# Altium PCB EmgAcqFinal.PcbDoc (part 1 of 2)
Units mil, origin at the board's own origin, x right, y up, seen from the top; angles counter-clockwise.
Board outline 3500 x 2175 mil, 2 copper layers (Top Layer, Bottom Layer); 116 components, 96 nets, 364 pads, 143 vias.
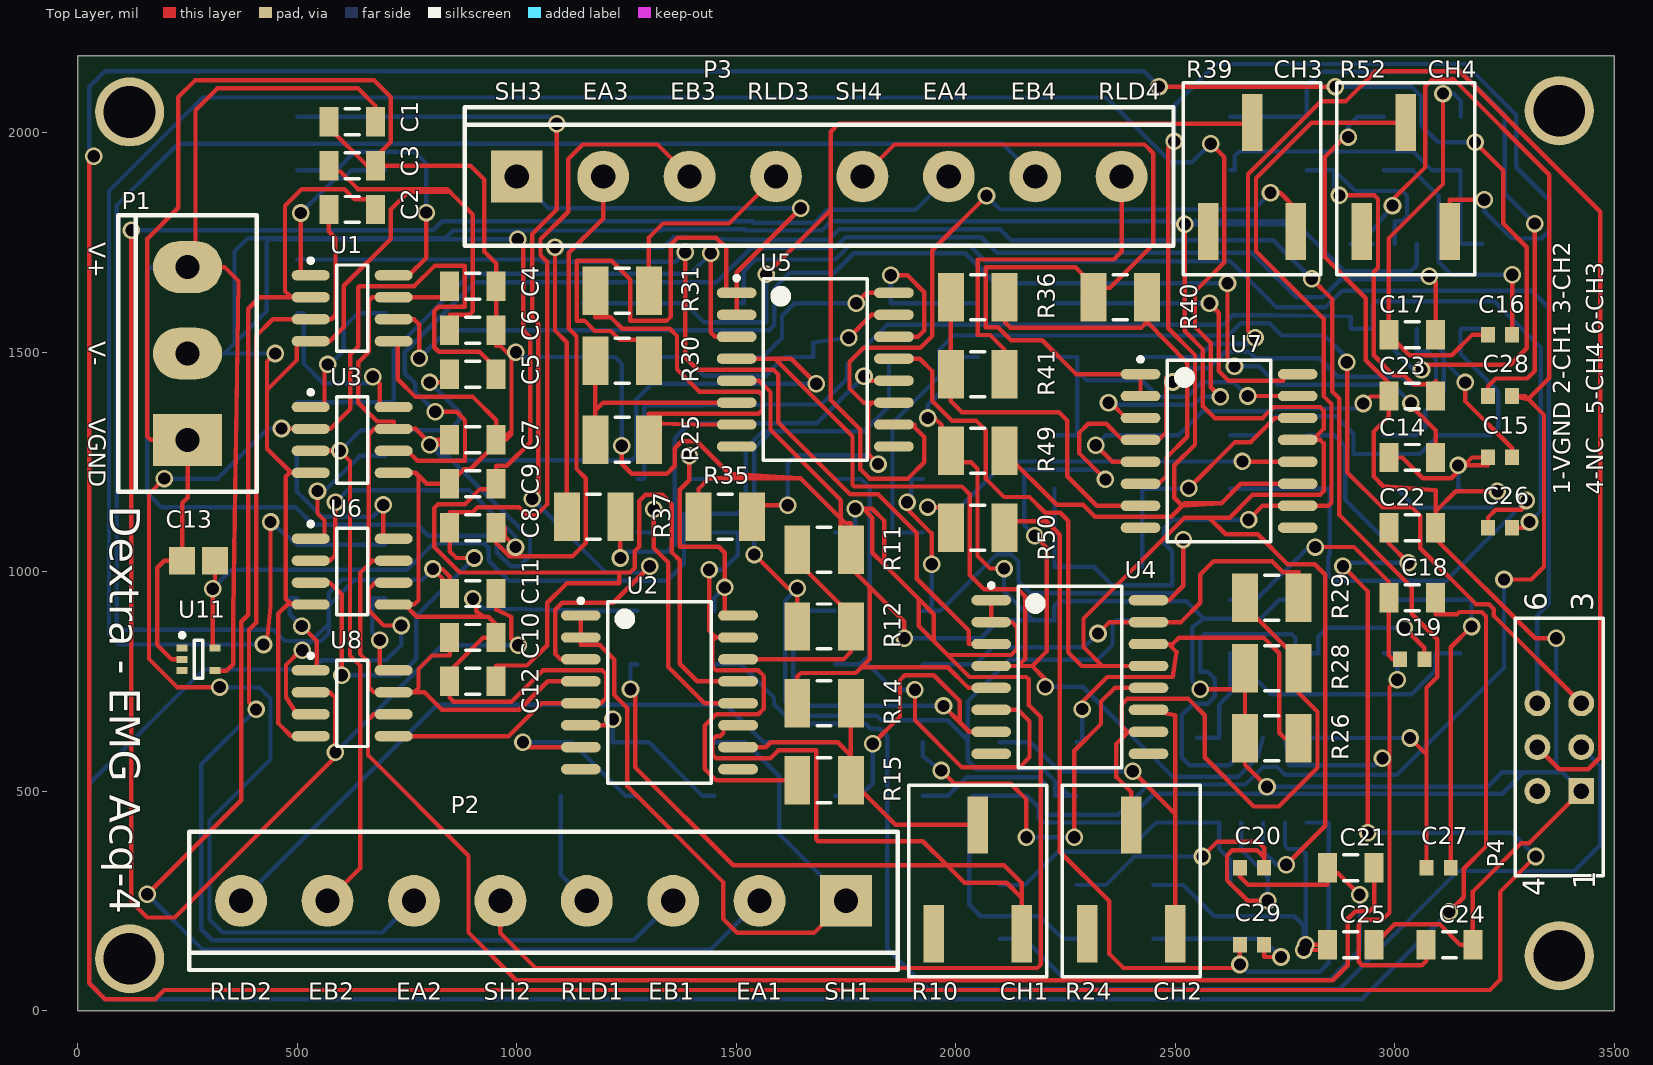
[diagram p0: Top Layer view]
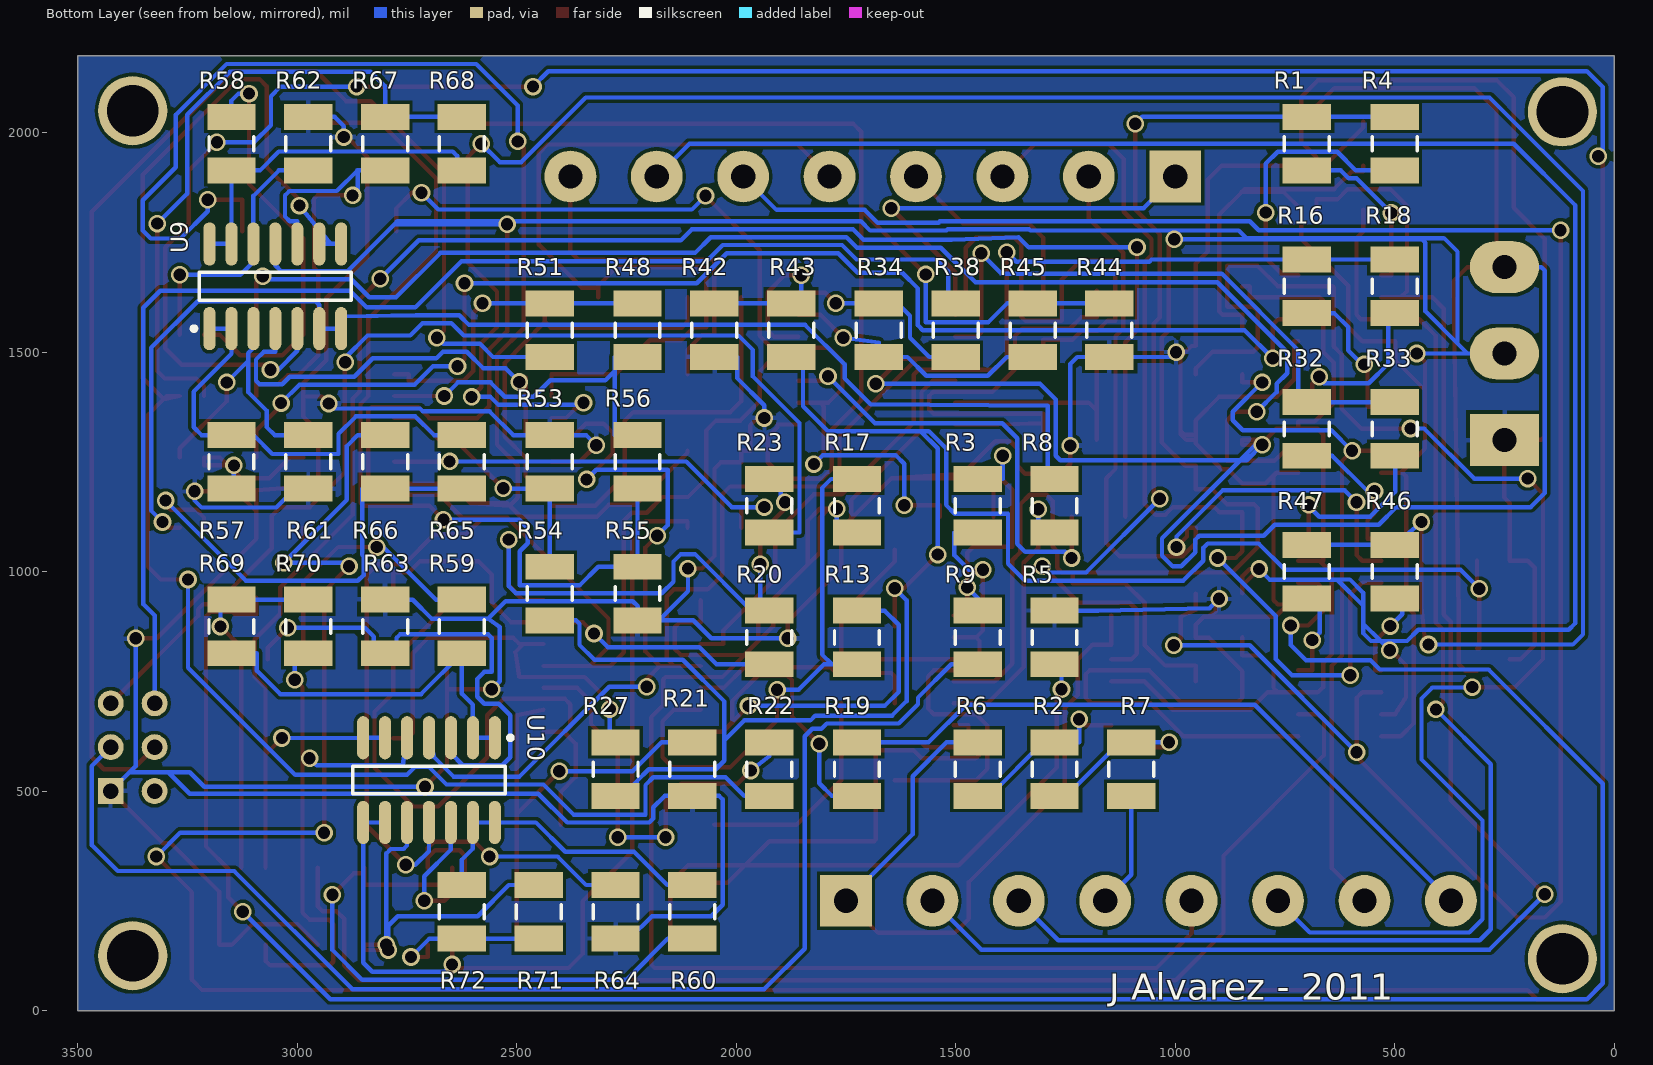
[diagram p1: Bottom Layer view, seen from below]

## Layer stack, top to bottom
Top Layer: signal copper 1.4
Dielectric: dielectric 12.6, FR-4, Dk 4.8
Bottom Layer: signal copper 1.4

## Board outline
0,2175 3500,2175 3500,0 0,0 0,2165.35

## Design rules (kind name [scope] priority, off if disabled: settings)
Clearance [All] p1: gap=8
HoleSize [All] p1: absolutevalues=TRUE maxlimit=110 minlimit=1 maxpercent=80.000 minpercent=20.000
HoleToHoleClearance [All] p1: gap=8 allowstackedmicrovias=TRUE
MinimumSolderMaskSliver [All] p1: minsoldermaskwidth=8
PolygonConnect [All] p1: connectstyle=Relief reliefconductorwidth=10 reliefentries=4 polygonreliefangle="90 Angle"
RoomDefinition EmgAcq [InComponentClass('EmgAcq')] p1: confinementstyle=ConfineIn formatcopy=TRUE lockcomponents=FALSE outline 0,0 3500,0 3500,2175 0,2175
RoutingVias [All] p1: holewidth=28 width=40 viastyle="Through Hole" minholewidth=28 minwidth=40 maxholewidth=28 maxwidth=40
SilkToSilkClearance [All] p1: silktosilkclearance=1
SilkscreenOverComponentPads [All] p1: minsilkscreentomaskgap=2
SolderMaskExpansion [All] p1: expansion=4
ViasUnderSMD [All] p1: allowed=FALSE
Width [All] p1: maxlimit=10 minlimit=8 preferedwidth=10
23 further rules are at their usual default settings.

## Components (designator, comment, footprint, x,y, rotation, side; value= is the part's Value field where it differs from the comment)
C1 "Cap Semi" C1206 625,2025 r180 top
C2 "Cap Semi" C1206 625,1825 r0 top
C3 "Cap Semi" C1206 625,1925 r180 top
C4 "Cap Semi" C1206 900,1650 r0 top
C5 "Cap Semi" C1206 900,1450 r0 top
C6 "Cap Semi" C1206 900,1550 r180 top
C7 "Cap Semi" C1206 900,1300 r0 top
C8 "Cap Semi" C1206 900,1100 r0 top
C9 "Cap Semi" C1206 900,1200 r0 top
C10 "Cap Semi" C1206 900,850 r0 top
C11 "Cap Semi" C1206 900,950 r0 top
C12 "Cap Semi" C1206 900,750 r0 top
C13 "Cap Semi" CAPC2012M 275,1025 r180 top
C14 "Cap Semi" C1206 3040,1260 r0 top
C15 "Cap Semi" 1608[0603] 3240,1260 r180 top
C16 "Cap Semi" 1608[0603] 3240,1540 r180 top
C17 "Cap Semi" C1206 3040,1540 r0 top
C18 "Cap Semi" C1206 3040,940 r0 top
C19 "Cap Semi" 1608[0603] 3040,800 r180 top
C20 "Cap Semi" 1608[0603] 2675,325 r180 top
C21 "Cap Semi" C1206 2900,325 r0 top
C22 "Cap Semi" C1206 3040,1100 r180 top
C23 "Cap Semi" C1206 3040,1400 r0 top
C24 "Cap Semi" C1206 3125,150 r180 top
C25 "Cap Semi" C1206 2900,150 r180 top
C26 "Cap Semi" 1608[0603] 3240,1100 r180 top
C27 "Cap Semi" 1608[0603] 3100,325 r0 top
C28 "Cap Semi" 1608[0603] 3240,1400 r180 top
C29 "Cap Semi" 1608[0603] 2675,150 r0 top
P1 "VIN" AZUL5-3 250,1300 r90 top
P2 "EMG CH1-2" AZUL5-8 1750,250 r180 top
P3 "EMG CH3-4" AZUL5-8 1000,1900 r0 top
P4 "SHEADER 2x8" "SHBH 2x3" 3425,500 r90 top
R1 "Res3" RESC3225M 700,1975 r90 bottom
R2 "Res3" RESC3225M 1275,550 r270 bottom
R3 "Res3" RESC3225M 1450,1150 r90 bottom
R4 "Res3" RESC3225M 500,1975 r90 bottom
R5 "Res3" RESC3225M 1275,850 r270 bottom
R6 "Res3" RESC3225M 1450,550 r270 bottom
R7 "Res3" RESC3225M 1100,550 r270 bottom
R8 "Res3" RESC3225M 1275,1150 r90 bottom
R9 "Res3" RESC3225M 1450,850 r270 bottom
R10 "POT3361" 3361P 2050,175 r0 top
R11 "Res3" RESC3225M 1700,1050 r0 top
R12 "Res3" RESC3225M 1700,875 r0 top
R13 "Res3" RESC3225M 1725,850 r90 bottom
R14 "Res3" RESC3225M 1700,700 r0 top
R15 "Res3" RESC3225M 1700,525 r180 top
R16 "Res3" RESC3225M 700,1650 r90 bottom
R17 "Res3" RESC3225M 1725,1150 r90 bottom
R18 "Res3" RESC3225M 500,1650 r90 bottom
R19 "Res3" RESC3225M 1725,550 r90 bottom
R20 "Res3" RESC3225M 1925,850 r90 bottom
R21 "Res3" RESC3225M 2100,550 r90 bottom
R22 "Res3" RESC3225M 1925,550 r270 bottom
R23 "Res3" RESC3225M 1925,1150 r270 bottom
R24 "POT3361" 3361P 2400,175 r0 top
R25 "Res3" RESC3225M 1240,1300 r0 top
R26 "Res3" RESC3225M 2720,620 r180 top
R27 "Res3" RESC3225M 2275,550 r90 bottom
R28 "Res3" RESC3225M 2720,780 r0 top
R29 "Res3" RESC3225M 2720,940 r0 top
R30 "Res3" RESC3225M 1240,1480 r180 top
R31 "Res3" RESC3225M 1240,1640 r0 top
R32 "Res3" RESC3225M 700,1325 r90 bottom
R33 "Res3" RESC3225M 500,1325 r90 bottom
R34 "Res3" RESC3225M 1675,1550 r90 bottom
R35 "Res3" RESC3225M 1475,1125 r0 top
R36 "Res3" RESC3225M 2050,1625 r180 top
R37 "Res3" RESC3225M 1175,1125 r180 top
R38 "Res3" RESC3225M 1500,1550 r90 bottom
R39 "POT3361" 3361P 2675,1775 r0 top
R40 "Res3" RESC3225M 2375,1625 r0 top
R41 "Res3" RESC3225M 2050,1450 r0 top
R42 "Res3" RESC3225M 2050,1550 r270 bottom
R43 "Res3" RESC3225M 1875,1550 r90 bottom
R44 "Res3" RESC3225M 1150,1550 r90 bottom
R45 "Res3" RESC3225M 1325,1550 r270 bottom
R46 "Res3" RESC3225M 500,1000 r90 bottom
R47 "Res3" RESC3225M 700,1000 r90 bottom
R48 "Res3" RESC3225M 2225,1550 r90 bottom
R49 "Res3" RESC3225M 2050,1275 r0 top
R50 "Res3" RESC3225M 2050,1100 r0 top
R51 "Res3" RESC3225M 2425,1550 r270 bottom
R52 "POT3361" 3361P 3025,1775 r0 top
R53 "Res3" RESC3225M 2425,1250 r90 bottom
R54 "Res3" RESC3225M 2425,950 r90 bottom
R55 "Res3" RESC3225M 2225,950 r90 bottom
R56 "Res3" RESC3225M 2225,1250 r90 bottom
R57 "Res3" RESC3225M 3150,1250 r90 bottom
R58 "Res3" RESC3225M 3150,1975 r270 bottom
R59 "Res3" RESC3225M 2625,875 r270 bottom
R60 "Res3" RESC3225M 2100,225 r90 bottom
R61 "Res3" RESC3225M 2975,1250 r270 bottom
R62 "Res3" RESC3225M 2975,1975 r90 bottom
R63 "Res3" RESC3225M 2800,875 r90 bottom
R64 "Res3" RESC3225M 2275,225 r270 bottom
R65 "Res3" RESC3225M 2625,1250 r90 bottom
R66 "Res3" RESC3225M 2800,1250 r270 bottom
R67 "Res3" RESC3225M 2800,1975 r90 bottom
R68 "Res3" RESC3225M 2625,1975 r270 bottom
R69 "Res3" RESC3225M 3150,875 r270 bottom
R70 "Res3" RESC3225M 2975,875 r90 bottom
R71 "Res3" RESC3225M 2450,225 r270 bottom
R72 "Res3" RESC3225M 2625,225 r90 bottom
U1 "INA128U" 182H_N 625,1600 r0 top
U2 "OPA4131UA" 211F_N 1325,725 r0 top
U3 "INA128U" 182H_N 625,1300 r0 top
U4 "OPA4131UA" 211F_N 2260,760 r0 top
U5 "OPA4131UA" 211F_N 1680,1460 r0 top
U6 "INA128U" 182H_N 625,1000 r0 top
U7 "OPA4131UA" 211F_N 2600,1275 r0 top
U8 "INA128U" 182H_N 625,700 r0 top
U9 "OPA4134" SOIC127P600-14M 3050,1650 r90 bottom
U10 "OPA4134" SOIC127P600-14M 2700,525 r270 bottom
U11 "TPS71525" SOT353-5L 275,800 r0 top

## Footprints (in the part's own frame and the unit in brackets; to place one, negate y for a bottom-side part, rotate by r counter-clockwise, add the part's x,y. Pads: shape width x height; smd on the part's side, far side on the other; paste and mask are expansions set on the pad)
182H_N [mm] "SOIC, 8-Leads, Body 4.9x3.9mm, Pitch 1.27mm, IPC Medium Density"
  oval 2.2x0.6 smd: 1(-2.4,1.905) 2(-2.4,0.635) 3(-2.4,-0.635) 4(-2.4,-1.905) 5(2.4,-1.905) 6(2.4,-0.635) 7(2.4,0.635) 8(2.4,1.905)
  silkscreen extent -2.52,-2.5 0.9,2.88, body extent -1.95,-2.45 1.95,2.45, height 1.75
211F_N [mm] "SOIC, 16-Leads, Body 10.3x7.5mm, Pitch 1.27mm, IPC Medium Density"
  oval 2.3x0.6 smd: 1(-4.55,4.445) 2(-4.55,3.175) 3(-4.55,1.905) 4(-4.55,0.635) 5(-4.55,-0.635) 6(-4.55,-1.905) 7(-4.55,-3.175) 8(-4.55,-4.445) 9(4.55,-4.445) 10(4.55,-3.175) 11(4.55,-1.905) 12(4.55,-0.635) 13(4.55,0.635) 14(4.55,1.905) 15(4.55,3.175) 16(4.55,4.445)
  silkscreen extent -4.67,-5.25 3,5.42, body extent -3.75,-5.15 3.75,5.15, height 2.65
1608[0603] [mm] "Chip Capacitor, Body 1.6x0.8mm, IPC High Density"
  rect 0.8x0.9 smd: 1(-0.7,0) 2(0.7,0)
  body extent -0.87,-0.48 0.87,0.48, height 1.3
3361P [mm]
  rect 1.19x3.3 smd: 1(-2.54,0) 2(0,6.3) 3(2.54,0)
  silkscreen extent -3.98,-2.5 3.98,8.6
AZUL5-3 [mm]
  rect 3x4 hole 1.4: 1(0,0)
  oval 3x4 hole 1.4: 2(5,0) 3(10,0)
  silkscreen extent -3,-4 13,4
AZUL5-8 [mm]
  rect 3x3 hole 1.4: 1(0,0)
  round 3 hole 1.4: 2(5,0) 3(10,0) 4(15,0) 5(20,0) 6(25,0) 7(30,0) 8(35,0)
  silkscreen extent -3,-4 38,4
C1206 [mm] "Chip Capacitor, Body 3.2x1.6mm, IPC High Density"
  rect 1.1x1.7 smd: 1(-1.35,0) 2(1.35,0)
  silkscreen extent -0.4,-0.75 0.4,0.75, body extent -1.7,-0.9 1.7,0.9, height 1.3
CAPC2012M [mm] "Chip Capacitor, Body 2.0x1.3mm, IPC Low Density"
  rect 1.5x1.6 smd: 1(-0.95,0) 2(0.95,0)
  body extent -1.1,-0.72 1.1,0.72, height 1.1
RESC3225M [mm] "Chip Resistor, Body 3.2x2.5mm, IPC Low Density"
  rect 1.5x2.8 smd: 1(-1.55,0) 2(1.55,0)
  silkscreen extent -0.4,-1.3 0.4,1.3, body extent -1.68,-1.32 1.68,1.32, height 0.71
"SHBH 2x3" [mm] "Shrouded Box Header: 2x3-Pin, 0.100\" (2.54 mm) Male"
  rect 1.5x1.5 hole 0.9: 1(0,0)
  round 1.5 hole 0.9: 2(2.54,0) 3(5.08,0) 4(0,2.54) 5(2.54,2.54) 6(5.08,2.54)
  silkscreen extent -4.9,-1.27 10,3.81
SOIC127P600-14M [mm] "SOIC, 14-Leads, Body 8.7x3.9mm, Pitch 1.27mm, IPC Low Density"
  oval 2.5x0.7 smd: 1(-2.45,3.81) 2(-2.45,2.54) 3(-2.45,1.27) 4(-2.45,0) 5(-2.45,-1.27) 6(-2.45,-2.54) 7(-2.45,-3.81) 8(2.45,-3.81) 9(2.45,-2.54) 10(2.45,-1.27) 11(2.45,0) 12(2.45,1.27) 13(2.45,2.54) 14(2.45,3.81)
  silkscreen extent -2.57,-4.4 0.8,4.84, body extent -2,-4.38 2,4.38, height 1.75
SOT353-5L [mm] "SOT353, 5-Leads, Body 2x1.3mm, Pitch 0.65mm, Lead Span 2.1mm, IPC High Density"
  rect 0.65x0.4 smd: 1(-0.95,0.65) 2(-0.95,0) 3(-0.95,-0.65) 4(0.95,-0.65) 5(0.95,0.65)
  silkscreen extent -1.07,-1.1 0.25,1.52, body extent -0.7,-1.1 0.7,1.1, height 1.1

## Part data
C1 C2 C3 C4 C5 C6 C7 C8 C9 C10 C11 C12 C13 C14 C15 C16 C17 C18 C19 C20 C21 C22 C23 C24 C25 C26 C27 C28 C29: "Capacitor (Semiconductor SIM Model)"
P1: library part "Header 3", "Header, 3-Pin"
P2 P3: library part "Header 8", "Header, 8-Pin"
P4: library part "SB Header 2x3", "Shrouded Box Header: 2x8-Pin, 0.100\" (2.54 mm) Male"
R1 R2 R3 R4 R5 R6 R7 R8 R9 R11 R12 R13 R14 R15 R16 R17 R18 R19 R20 R21 R22 R23 R25 R26 R27 R28 R29 R30 R31 R32 R33 R34 R35 R36 R37 R38 R40 R41 R42 R43 R44 R45 R46 R47 R48 R49 R50 R51 R53 R54 R55 R56 R57 R58 R59 R60 R61 R62 R63 R64 R65 R66 R67 R68 R69 R70 R71 R72: "Resistor"
U1 U3 U6 U8: "Precision, Low-Power Instrumentation Amplifiers"
U2 U4 U5 U7: "General Purpose FET-Input Operational Amplifiers"

## Free pads (board coordinates)
  round 157.48 hole 118.11: 7(118.11,118.11) 10(118.11,2047.24) 13(3375,125) 14(3375,2050)

## Via types
v1: diameter 40, hole 28, Top Layer to Bottom Layer, 143 vias

## Nets (pads, with @x,y where several pads share a name; then routed paths per layer and width w, separated by ;. In a path a pad name is that pad's centre, name@x,y a point inside that pad or via, vN(x,y) a via of type N, cw(c..) or ccw(c..) an arc to the next point about the centre after c; other vN are vias at no path point)
EMCH1RLD: P2.4 R7.2 | length 263.6
  Bottom Layer w10: R7.2@1100,488.98 1100,309.45 P2.4@1159.45,250
EMCH1SH: P2.1 R6.1 U2.1 U2.2 | length 1701
  Top Layer w10: U2.1@1145.87,900 U2.2@1145.87,850 1145.87,832.94 1189.05,832.94 1222.14,799.85 1222.14,718.85 1252.05,688.94 1252.05,510.94 1470.05,292.94 1470.05,208.94 1502.05,176.94 1676.94,176.94 P2.1@1750,250
  Bottom Layer w10: R6.1@1450,611.02 1520.97,611.02 1598.05,533.94 1598.05,401.95 P2.1@1750,250
EMCH2RLD: P2.8 R19.2 | length 1573.7
  Bottom Layer w10: P2.8@372.05,250 818.99,696.94 1476.13,696.94 1562.05,611.02 R19.2@1725,611.02
EMCH2SH: P2.5 R17.1 U4.1 U4.2 | length 3381.3
  Top Layer w10: P2.5@962.6,250 962.6,176.94 1042.6,96.94 2186.05,96.94 2194.05,104.94 2194.05,667.94 2166.05,695.94 2166.05,754.94 2161.05,759.94 2031.59,759.94 1916.05,875.49 1916.05,936.94 ; v1(1771.05,1142.94) v1@1790.05,1142.94 ; U4.1@2080.87,935 U4.2@2080.87,885 2127.99,885 2140.05,872.94 2140.05,823.94 2126.05,809.94 1982.05,809.94 1950.05,841.94 1950.05,902.94 1916.05,936.94 ; v1@1790.05,1142.94 1810.05,1122.94 1810.05,1042.94 1837.53,1015.45 ; v1@1790.05,1142.94 1810.05,1142.94 1837.53,1115.46 1837.53,1015.45 ; 1837.53,1015.45 1916.05,936.94
  Bottom Layer w10: R17.1@1725,1088.98 1771.05,1088.98 v1(1771.05,1142.94)
EMCH3RLD: P3.4 R31.2 | length 468.1
  Top Layer w10: R31.2@1301.02,1640 1301.02,1760.94 1333.02,1792.94 1483.5,1792.94 P3.4@1590.55,1900
EMCH3SH: P3.1 R30.1 U5.1 U5.2 | length 2110.2
  Top Layer w10: R30.1@1301.02,1480 1301.02,1527.94 1234.22,1527.94 1214.05,1548.12 1177.87,1548.12 1154.11,1571.88 1136.45,1571.88 1136.45,1708.12 1215.87,1708.12 1258.49,1665.5 1258.49,1571.88 1342.05,1571.88 1351.05,1580.88 1351.05,1745.77 1366.05,1760.77 1454.05,1760.77 1477.05,1737.77 1477.05,1635 U5.1@1500.87,1635 ; U5.2@1500.87,1585 U5.1@1500.87,1635 ; v1(1647.05,1827.94) 1500.87,1681.76 U5.1@1500.87,1635
  Bottom Layer w10: P3.1@1000,1900 1072.06,1827.94 v1(1647.05,1827.94)
EMCH4RLD: P3.8 R41.2 | length 808.3
  Top Layer w10: R41.2@2111.02,1450 2111.02,1505.97 2078.11,1538.88 2050.49,1538.88 2050.49,1711.12 2360.13,1711.12 2377.95,1728.94 P3.8@2377.95,1900
EMCH4SH: P3.5 R40.1 U7.1 U7.2 | length 1958.2
  Top Layer w10: P3.5@1787.4,1900 1860.35,1972.94 2430.05,1972.94 2450.05,1952.94 2450.05,1744.94 2352.05,1646.94 R40.1@2313.98,1646.94 ; R40.1@2313.98,1625 R40.1@2313.98,1646.94 ; U7.2@2420.87,1400 U7.1@2420.87,1450 2273.99,1450 2197.05,1526.94 2125.98,1526.94 2096.05,1556.88 2068.49,1556.88 2068.49,1693.12 2272.8,1693.12 2313.98,1651.94 R40.1@2313.98,1646.94
EMCH101: C2.2 P2.2 U1.2 | length 3544.6
  Top Layer w10: v1(158.05,264.94) 372.05,478.94 372.05,885.48 388.05,901.48 388.05,1599 414.05,1625 486.05,1625 ; U1.2@530.51,1625 486.05,1625 ; C2.2@678.15,1825 678.15,1847.94 630.57,1847.94 607.05,1871.47 510.05,1871.47 472.05,1833.47 472.05,1639 486.05,1625
  Bottom Layer w10: v1(158.05,264.94) 284.05,138.94 1442.09,138.94 P2.2@1553.15,250
EMCH102: C2.1 P2.3 U1.3 | length 2987.2
  Top Layer w10: v1(406.05,685.94) 390.05,701.94 390.05,867.48 406.05,883.48 406.05,1536.94 444.1,1575 U1.3@530.51,1575 577.1,1575 587.05,1584.94 587.05,1759.94 571.85,1775.14 C2.1@571.85,1825
  Bottom Layer w10: v1(406.05,685.94) 281.05,560.94 281.05,184.94 306.05,159.94 1266.24,159.94 P2.3@1356.3,250
EMCH201: C5.2 P2.6 U3.2 | length 3269
  Top Layer w10: v1(197.05,1211.94) 162.05,1176.94 162.05,800.94 226.05,736.94 v1(323.05,736.94) ; v1(464.05,1325.94) 464.99,1325 U3.2@530.51,1325 575.1,1325 621.05,1370.94 621.05,1494.55 639.05,1512.55 639.05,1647.94 641.05,1649.94 766.05,1649.94 812.57,1696.47 881.51,1696.47 881.51,1603.53 822.05,1603.53 812.05,1593.53 812.05,1510.94 822.05,1500.94 915.05,1500.94 953.15,1462.84 C5.2@953.15,1450
  Bottom Layer w10: v1(197.05,1211.94) 319.05,1211.94 433.05,1325.94 v1(464.05,1325.94) ; v1(323.05,736.94) 324.05,735.94 414.05,735.94 439.05,710.94 439.05,571.94 299.99,432.89 299.99,208 330.05,177.94 693.69,177.94 P2.6@765.75,250
EMCH202: C5.1 P2.7 U3.3 | length 1619.9
  Top Layer w10: U3.3@530.51,1275 v1(597.05,1275) 620.05,1252 620.05,808.94 643.05,785.94 643.05,324.15 P2.7@568.9,250 ; v1(802.05,1430.94) 846.85,1430.94 C5.1@846.85,1450
  Bottom Layer w10: v1(597.05,1275) 644.12,1322.07 846.18,1322.07 869.05,1344.94 869.05,1363.94 v1(802.05,1430.94)
EMCH301: C8.2 P3.2 U6.2 | length 1891.9
  Top Layer w10: U6.2@530.51,1025 574.05,1025 586.82,1037.77 586.82,1157.94 v1(587.05,1157.94) ; v1(997.05,1055.94) 973.05,1079.94 973.05,1100 C8.2@953.15,1100 953.15,1064.94 983.15,1034.94 1127.05,1034.94 1157.05,1064.94 1157.05,1212.94 1136.05,1233.94 1136.05,1536.28 1118.45,1553.88 1118.45,1726.12 1196.85,1804.52 P3.2@1196.85,1900
  Bottom Layer w10: v1(587.05,1157.94) 614.05,1184.94 892.05,1184.94 997.05,1079.94 v1(997.05,1055.94)
EMCH302: C8.1 P3.3 U6.3 | length 2271.6
  Top Layer w10: U6.3@530.51,975 574.05,975 601.05,948 v1(601.05,763.94) ; v1(903.05,1030.94) 862.5,1030.94 846.85,1046.6 C8.1@846.85,1100 846.85,1135.53 899.51,1135.53 910.92,1146.94 1005.05,1146.94 1023.05,1128.94 1045.05,1128.94 1069.05,1152.94 1069.05,1705.94 1054.05,1720.94 1054.05,1756.94 1117.05,1819.94 1117.05,1939.94 1150.05,1972.94 1320.76,1972.94 P3.3@1393.7,1900
  Bottom Layer w10: v1(601.05,763.94) 734.05,763.94 771.05,800.94 771.05,898.94 v1(903.05,1030.94)
EMCH401: C11.2 P3.6 U8.2 | length 4935.3
  Top Layer w10: v1(122.05,1777.8) 122.05,247.94 158.05,211.94 220.82,211.94 586.82,577.94 v1(586.82,588.72) 586.82,712.23 574.05,725 U8.2@530.51,725 ; C11.2@953.15,950 953.15,913.37 987.81,896.47 987.81,847.19 v1(1003.05,831.94)
  Bottom Layer w10: v1(122.05,1777.8) 809.9,1777.8 830.05,1797.94 1536.05,1797.94 1539.05,1794.94 1678.05,1794.94 1707.05,1823.94 1908.2,1823.94 P3.6@1984.25,1900 ; v1(586.82,588.72) 830.05,831.94 v1(1003.05,831.94)
EMCH402: C11.1 P3.7 U8.3 | length 4655.1
  Top Layer w10: v1(511.05,820.94) 508.05,820.94 474.2,787.1 474.2,713.79 499.05,675 U8.3@530.51,675 ; C11.1@846.85,950 C11.1@846.85,968.14 ; C11.1@846.85,968.14 v1(809.05,1005.94) 830.05,1005.94 846.85,989.14 C11.1@846.85,968.14
  Bottom Layer w10: v1(511.05,820.94) 532.05,841.94 ; v1(809.05,1005.94) 785.05,981.94 ; P3.7@2181.1,1900 2106.6,1974.51 228.61,1974.51 89.05,1834.94 89.05,881.94 103.52,867.48 446.52,867.48 472.05,841.94 532.05,841.94 ; 532.05,841.94 572.05,881.94 ; 532.05,841.94 554.05,841.94 572.05,859.94 572.05,881.94 ; 572.05,881.94 572.05,922.51 ; 572.05,922.51 572.05,951.94 602.05,981.94 785.05,981.94 ; 572.05,922.51 631.05,981.51 784.61,981.51 785.05,981.94
EMGCH1: P4.2 R9.2 | length 2993.7
  Bottom Layer w10: R9.2@1450,788.98 1510.05,788.98 1586.05,712.98 1586.05,697.94 1630.05,653.94 1794.05,653.94 1806.05,641.94 1827.05,641.94 1844.05,624.94 1844.05,140.94 1936.05,48.94 2875.05,48.94 3144.05,317.94 3409.05,317.94 3468.05,376.94 3468.05,556.95 P4.2@3425,600
EMGCH2: P4.3 R23.2 | length 2580.2
  Top Layer w10: v1(2891.05,1476.94) 2892.05,1475.94 2892.05,1225.94 2971.05,1146.94 3038.05,1146.94 3058.05,1126.94 3058.05,1052.94 3185.05,925.94 3214.05,925.94 3226.05,913.94 3226.05,898.95 P4.3@3425,700
  Bottom Layer w10: R23.2@1925,1088.98 1856.05,1088.98 1856.05,1338.47 1962.05,1444.47 1962.05,1504.94 1995.05,1537.94 2620.85,1537.94 2648.88,1565.98 2714.88,1565.98 2742.91,1537.94 2840.05,1537.94 2891.05,1486.94 v1(2891.05,1476.94)
EMGCH3: P4.6 R38.2 | length 2951.2
  Bottom Layer w10: R38.2@1500,1611.02 1517.05,1611.02 1517.05,1683.94 1544.05,1710.94 1726.05,1710.94 1759.05,1743.94 2031.05,1743.94 2068.05,1706.94 2626.05,1706.94 2731.02,1601.98 2842.08,1601.98 2880.05,1639.94 3312.05,1639.94 3351.05,1600.94 3351.05,925.99 3325,899.94 P4.6@3325,700
EMGCH4: P4.5 R51.2 | length 3103.7
  Top Layer w10: v1(2681.88,1532.98) 2665.88,1548.98 2665.88,1904.94 2832.88,2071.94 2889.05,2071.94 2957.05,2139.94 3148.05,2139.94 3468.05,1819.94 3468.05,576.94 3441.05,549.94 3375.06,549.94 P4.5@3325,600
  Bottom Layer w10: R51.2@2425,1488.98 2554.08,1488.98 2584.05,1518.94 2667.85,1518.94 v1(2681.88,1532.98)
NetC14_1: C14.1 C15.2 R57.1 | length 409.2
  Top Layer w10: C14.1@2986.85,1260 3016.99,1260 3064.05,1212.94 3128.99,1212.94 v1@3157.99,1241.94 ; v1(3144.43,1241.94) v1@3157.99,1241.94 ; v1@3157.99,1241.94 3176.05,1260 C15.2@3212.44,1260 3212.44,1241.94 v1@3157.99,1241.94
  Bottom Layer w10: v1(3144.43,1241.94) 3144.43,1188.98 R57.1@3150,1188.98
NetC15_1: C15.1 R61.1 U9.3 | length 633.5
  Top Layer w10: v1(3161.05,1430.94) 3161.05,1387.46 3267.56,1280.94 C15.1@3267.56,1260
  Bottom Layer w10: R61.1@2975,1311.02 3051.64,1311.02 3070.05,1329.43 3070.05,1366.94 3112.05,1408.94 3112.05,1479.94 ; U9.3@3100,1553.54 3100,1509.33 3112.05,1497.28 3112.05,1479.94 ; v1(3161.05,1430.94) 3112.05,1479.94
NetC16_1: C16.1 R62.1 U9.12 | length 615
  Top Layer w10: C16.1@3267.56,1540 v1(3267.56,1675.94)
  Bottom Layer w10: R62.1@2975,1913.98 3041.97,1913.98 3100,1855.94 U9.12@3100,1746.46 3100,1705.94 3130,1675.94 v1(3267.56,1675.94)
NetC16_2: C16.2 C17.1 R58.1 | length 948.1
  Top Layer w10: v1(3110.05,2088.94) 3110.05,1882.94 2986.85,1759.75 C17.1@2986.85,1540 3033.91,1492.94 3130.05,1492.94 3177.1,1540 C16.2@3212.44,1540
  Bottom Layer w10: v1(3110.05,2088.94) 3134.05,2088.94 3150.05,2072.94 R58.1@3150,2036.02
NetC18_1: C18.1 C19.2 R59.1 | length 641.1
  Top Layer w10: v1(2819.05,1055.94) 2907.05,1055.94 2986.85,976.14 C18.1@2986.85,940 2986.85,808.94 2995.8,800 C19.2@3012.44,800
  Bottom Layer w10: R59.1@2625,936.02 2684.05,936.02 2803.97,1055.94 v1(2819.05,1055.94)
NetC19_1: C19.1 R63.1 U10.3 | length 1179.1
  Top Layer w10: v1(3022.05,871.94) 3067.56,826.43 C19.1@3067.56,800
  Bottom Layer w10: U10.3@2650,621.46 2650,585.94 2623,558.94 2533.05,558.94 2515.05,576.94 2515.05,672.94 2541.05,698.94 2574.05,698.94 2590.05,714.94 2590.05,755.45 2574.05,771.45 2556.88,771.45 2556.88,848.94 2564.88,856.94 2766.05,856.94 2774.05,848.94 2774.05,813.98 R63.1@2800,813.98 2826.05,813.98 2826.05,851.94 2846.05,871.94 v1(3022.05,871.94)
NetC20_1: C20.1 R64.1 U10.12 | length 988.7
  Top Layer w10: v1(2562.05,350.94) 2596.05,384.94 2688.05,384.94 2702.56,370.43 2702.56,348.43 ; C20.1@2702.56,325 2702.56,348.43 ; v1(2711.05,249.94) 2665.05,249.94 2618.05,296.94 2618.05,352.94 2630.05,364.94 2686.05,364.94 2702.56,348.43
  Bottom Layer w10: R64.1@2275,286.02 2342.05,286.02 2406.97,350.94 v1(2562.05,350.94) ; U10.12@2650,428.54 2650,366.99 2711.05,305.94 v1(2711.05,249.94)
NetC20_2: C20.2 C21.1 R60.1 | length 1371.8
  Top Layer w10: C20.2@2647.44,325 2647.44,304.94 2665.83,286.55 2846.85,286.55 C21.1@2846.85,312.94 ; C21.1@2846.85,325 C21.1@2846.85,312.94 ; v1(2920.05,263.94) 2871.05,312.94 C21.1@2846.85,312.94
  Bottom Layer w10: R60.1@2100,163.98 2156.02,163.98 2249.62,70.37 2852.48,70.37 2920.05,137.94 v1(2920.05,263.94)
NetC22_2: C22.2 R66.1 U9.5 | length 11506
  Top Layer w10: v1(36.05,1945.94) 26.05,1935.94 26.05,61.94 62.05,25.94 176.05,25.94 197.05,46.94 3217.05,46.94 3240.05,69.94 3240.05,269.94 v1(3321.05,350.94) ; v1(2463.05,2104.94) v1(2865.05,2104.94) ; v1(2882.05,1011.94) 2939.05,954.94 v1(2939.05,404.94) ; C22.2@2986.85,1100 2986.85,1064.14 v1(3031.05,1019.94) ; v1(3061.05,1459.94) 3072.05,1470.94 3263.05,1470.94 3301.05,1508.94 3301.05,1738.94 3247.05,1792.94 3247.05,1913.94 v1(3183.05,1977.94)
  Bottom Layer w10: v1(36.05,1945.94) 26.05,1955.94 26.05,2103.94 62.05,2139.94 2428.05,2139.94 v1(2463.05,2104.94) ; R66.1@2800,1311.02 2862.05,1311.02 2887.05,1286.02 2887.05,1163.94 v1(3031.05,1019.94) 2890.05,1019.94 v1(2882.05,1011.94) ; v1(2865.05,2104.94) 3038.05,2104.94 3060.05,2082.94 3060.05,2016.94 3099.05,1977.94 v1(3183.05,1977.94) ; v1(2939.05,404.94) 3267.05,404.94 v1(3321.05,350.94) ; U9.5@3000,1553.54 3000,1502.99 3043.05,1459.94 v1(3061.05,1459.94)
NetC23_2: C23.2 R67.1 U9.10 | length 1102.5
  Top Layer w10: v1(2874.05,1856.94) 2954.05,1856.94 2962.05,1848.94 2962.05,1691.94 2952.2,1682.09 2952.2,1492.94 2998.2,1446.94 3022.05,1446.94 3042.05,1426.94 3086.15,1426.94 3093.15,1433.94 C23.2@3093.15,1400
  Bottom Layer w10: R67.1@2800,1913.98 2862.05,1913.98 ; v1(2874.05,1856.94) 2862.05,1868.94 2862.05,1913.98 ; U9.10@3000,1746.46 3000,1798.31 3017.42,1798.31 3028.05,1808.94 3028.05,1856.94 3018.05,1866.94 2910.05,1866.94 2863.02,1913.98 2862.05,1913.98
NetC24_2: C24.2 R70.1 U10.5 | length 1299.8
  Top Layer w10: v1(2972.05,574.94) 2988.05,558.94 ; v1(3006.05,753.94) 3005.05,753.94 2988.05,736.94 2988.05,558.94 ; C24.2@3071.85,150 3071.85,112.75 3062.05,102.94 2926.05,102.94 2918.05,110.94 2918.05,196.94 2928.38,207.28 2972.31,207.28 2988.05,223.02 2988.05,558.94
  Bottom Layer w10: U10.5@2750,621.46 2760.05,558.94 2956.05,558.94 v1(2972.05,574.94) ; R70.1@2975,813.98 3006.05,813.98 v1(3006.05,753.94)
NetC25_2: C25.2 R71.1 U10.10 | length 867.3
  Top Layer w10: v1(2793.05,137.94) 2846.85,137.94 C25.2@2846.85,149.94 ; v1(2797.05,149.94) C25.2@2846.85,149.94 ; C25.2@2846.85,150 C25.2@2846.85,149.94
  Bottom Layer w10: R71.1@2450,286.02 2518.05,286.02 2589,215.07 2770.92,215.07 2793.05,192.94 v1(2793.05,137.94) ; U10.10@2750,428.54 2750,375.99 2757.86,368.14 2786.86,368.14 2797.05,357.94 v1(2797.05,149.94)
NetC26_2: C26.2 R65.1 R66.2 | length 1089.7
  Top Layer w10: C26.2@3212.44,1100 3212.44,1123.34 3230.05,1140.94 3288.05,1140.94 3300.05,1152.94 v1(3300.05,1161.94)
  Bottom Layer w10: R65.1@2625,1188.98 R66.2@2800,1188.98 2852.05,1188.98 2852.05,1037.94 2849.05,1034.94 2849.05,991.94 2862.05,978.94 3117.05,978.94 v1(3300.05,1161.94)
NetC27_2: C27.2 R69.1 R70.2 | length 830.7
  Top Layer w10: C27.2@3127.56,325 3127.56,827.46 v1(3175.05,874.94)
  Bottom Layer w10: R70.2@2975,936.02 R69.1@3150,936.02 3175.05,936.02 v1(3175.05,874.94)
NetC28_2: C28.2 R67.2 R68.1 | length 1505.2
  Top Layer w10: C28.2@3212.44,1400 3212.44,1422.34 3230.05,1439.94 3302.05,1439.94 3319.05,1456.94 v1(3319.05,1792.94)
  Bottom Layer w10: R68.1@2625,2036.02 R67.2@2800,2036.02 2800,2105.94 2832.45,2138.39 3153.6,2138.39 3251.05,2040.94 3251.05,1860.94 v1(3319.05,1792.94)
NetC29_2: C29.2 R71.2 R72.1 | length 375
  Top Layer w10: C29.2@2702.56,150 2702.56,121.94 v1(2741.05,121.94)
  Bottom Layer w10: R71.2@2450,163.98 R72.1@2625,163.98 2699.02,163.98 v1(2741.05,121.94)
NetR1_1: R1.1 U1.1 | length 396.6
  Top Layer w10: v1(508.05,1816.98) 508.05,1675 U1.1@530.51,1675
  Bottom Layer w10: v1(508.05,1816.98) 587.05,1895.97 605.04,1895.97 623.05,1913.98 R1.1@700,1913.98
NetR2_1: R2.1 R6.2 U2.6 | length 413.4
  Top Layer w10: U2.6@1145.87,650 1205.1,650 v1(1219.05,663.94)
  Bottom Layer w10: v1(1219.05,663.94) 1219.05,611.02 R2.1@1275,611.02 1301.05,611.02 1423.09,488.98 R6.2@1450,488.98
NetR2_2: R2.2 R7.1 U2.7 | length 447.9
  Top Layer w10: v1(1014.04,611.02) 1025.06,600 U2.7@1145.87,600
  Bottom Layer w10: v1(1014.04,611.02) R7.1@1100,611.02 1126.05,611.02 1248.09,488.98 R2.2@1275,488.98
NetR3_1: R3.1 R15.2 U2.15 | length 1135.7
  Top Layer w10: v1(1438.05,1003.96) 1438.05,866 1454.05,850 ; U2.15@1504.13,850 1454.05,850 ; R15.2@1638.98,525 1638.98,524.94 1454.05,524.94 1427.86,551.13 1427.86,648.75 1454.05,674.94 1550.05,674.94 1563.05,687.94 1563.05,761.94 1550.05,774.94 1454.05,774.94 1445.86,783.13 1445.86,841.81 1454.05,850
  Bottom Layer w10: v1(1438.05,1003.96) 1470.05,1003.96 1503.05,1036.96 1503.05,1088.98 R3.1@1450,1088.98
NetR3_2: R3.2 R9.1 U2.16 | length 670.1
  Top Layer w10: v1(1393.05,1263.94) 1393.05,1207.94 1371.45,1186.34 1371.45,1056.88 1460.05,1056.88 1474.05,1042.88 v1(1474.05,963.94) 1474.05,900 U2.16@1504.13,900
  Bottom Layer w10: v1(1393.05,1263.94) 1393.05,1211.02 R3.2@1450,1211.02 ; R9.1@1450,911.02 1450,939.9 v1(1474.05,963.94)
NetR4_1: R4.1 U1.8 | length 628.2
  Top Layer w10: U1.8@719.49,1675 754.05,1675 794.05,1715 v1(794.05,1817.94)
  Bottom Layer w10: R4.1@500,1913.98 588.52,1913.98 631.05,1956.51 766.49,1956.51 794.05,1928.94 v1(794.05,1817.94)
NetR5_2: R5.2 R10.3 U2.11 | length 2449.5
  Top Layer w10: v1(1259.05,731.94) 1270.14,720.85 1270.14,553.85 1493.05,330.94 1980.05,330.94 ; U2.11@1504.13,650 1471.05,650 1471.05,632.94 1463.05,624.94 1453.86,624.94 1445.86,616.94 1445.86,583.13 1454.05,574.94 1577.87,574.94 1596.05,593.12 1682.05,593.12 1682.05,389.94 1686.05,385.94 1925.05,385.94 1980.05,330.94 ; R10.3@2150,175 2150,256.94 ; 1980.05,330.94 2020,290.99 2115.95,290.99 2150,256.94 ; 1980.05,330.94 2110.05,330.94 2150,290.99 2150,256.94
  Bottom Layer w10: v1(1259.05,731.94) 1259.05,788.98 R5.2@1275,788.98
NetR8_1: R8.1 U2.12 | length 656.2
  Top Layer w10: v1(1312.05,1141.94) 1312.05,1053.88 1345.05,1020.88 1345.05,782.77 1427.82,700 U2.12@1504.13,700
  Bottom Layer w10: R8.1@1275,1088.98 1312.05,1088.98 v1(1312.05,1141.94)
NetR10_2: R10.2 R14.2 R15.1 U2.10 | length 780.2
  Top Layer w10: U2.10@1504.13,600 1567.33,600 1578.45,611.12 1730.93,611.12 1761.02,581.02 ; R14.2@1761.02,700 1761.02,581.02 ; R10.2@2050,423.03 1862.99,423.03 R15.1@1761.02,525 1761.02,581.02
NetR11_1: R11.1 R12.2 U2.14 | length 547.5
  Top Layer w10: U2.14@1504.13,800 1744.08,800 1761.02,816.94 R12.2@1761.02,875 1761.02,900.94 1638.98,1022.99 R11.1@1638.98,1050
NetR13_1: R13.1 R17.2 U4.6 | length 1269.6
  Top Layer w10: v1(1907.1,730.94) 1907.1,661.18 2014.34,553.94 2145.05,553.94 2168.05,576.94 2168.05,659 2142.05,685 U4.6@2080.87,685
  Bottom Layer w10: R13.1@1725,788.98 1782.08,788.98 ; R17.2@1725,1211.02 1783.97,1211.02 1804.44,1190.56 1804.44,811.33 1782.08,788.98 ; v1(1907.1,730.94) 1858.08,730.94 1800.05,788.98 1782.08,788.98
NetR13_2: R13.2 R19.1 U4.7 | length 1353.1
  Top Layer w10: v1(1811.05,607.94) 1873.05,669.94 1873.05,752.94 1884.05,763.94 1950.05,763.94 2008.99,705 2008.99,657.06 ; v1(1972.1,693.94) 2008.99,657.06 ; U4.7@2080.87,635 2031.05,635 ; 2008.99,657.06 2031.05,635 ; 2008.99,657.06 2008.99,656.06 2030.05,635 2031.05,635
  Bottom Layer w10: R19.1@1725,488.98 1782.05,488.98 1811.05,517.98 v1(1811.05,607.94) ; R13.2@1725,911.02 1662.05,911.02 1630.05,879.02 1630.05,725.94 1662.05,693.94 v1(1972.1,693.94)
NetR16_1: R16.1 U3.1 | length 341.9
  Top Layer w10: U3.1@530.51,1375 562.05,1375 562.05,1464.94 v1(569.05,1471.94)
  Bottom Layer w10: v1(569.05,1471.94) 574.05,1471.94 606.05,1503.94 606.05,1556.98 638.05,1588.98 R16.1@700,1588.98
NetR18_1: R18.1 U3.8 | length 422.5
  Top Layer w10: v1(672.05,1443.94) 688.05,1427.94 688.05,1375 U3.8@719.49,1375
  Bottom Layer w10: R18.1@500,1588.98 515.05,1588.98 515.05,1472.94 559.05,1428.94 662.05,1428.94 672.05,1438.94 v1(672.05,1443.94)
NetR20_1: R20.1 R29.2 U4.15 | length 1059.9
  Top Layer w10: v1(2324.05,858.94) 2350.1,885 U4.15@2439.13,885 2513.1,885 2557.05,928.94 2557.05,993.12 2587.46,1023.53 2720.43,1023.53 2745.02,998.94 2781.02,998.94 R29.2@2781.02,940
  Bottom Layer w10: R20.1@1925,788.98 2045.08,788.98 2084.05,827.94 2293.05,827.94 v1(2324.05,858.94)
NetR20_2: R20.2 R23.1 U4.16 | length 1375.3
  Top Layer w10: v1(1889.05,1157.94) 1889.05,1142.94 1945.05,1086.94 v1(1945.05,1016.94) ; U4.16@2439.13,935 2486.05,935 2518.55,967.5 v1(2518.55,1072.94)
  Bottom Layer w10: v1(1889.05,1157.94) 1899.05,1167.94 1899.05,1211.02 R23.1@1925,1211.02 ; R20.2@1925,911.02 R20.2@1945.05,911.02 ; v1(1945.05,1016.94) R20.2@1945.05,911.02 ; v1(2518.55,1072.94) 2518.55,966.99 2502.05,950.49 2169.5,950.49 2143.05,976.94 2143.05,1022.94 2126.05,1039.94 2094.05,1039.94 1965.13,911.02 R20.2@1945.05,911.02
NetR21_2: R21.2 R24.3 U4.11 | length 1027.5
  Top Layer w10: v1(2403.05,544.94) 2500,447.99 ; U4.11@2439.13,685 2500,672.94 2500,447.99 ; R24.3@2500,175 2500,447.99
  Bottom Layer w10: R21.2@2100,611.02 2170.05,611.02 2236.13,544.94 v1(2403.05,544.94)
NetR22_1: R22.1 U4.12 | length 956.5
  Top Layer w10: v1(1967.05,546.94) 1997.05,516.94 2125.05,516.94 2161.05,480.94 v1(2161.05,394.94) ; v1(2270.05,394.94) 2270.05,591.94 2331.05,652.94 2331.05,703.94 2362.1,735 U4.12@2439.13,735
  Bottom Layer w10: R22.1@1925,611.02 1925,578.94 v1(1967.05,546.94) ; v1(2161.05,394.94) v1(2270.05,394.94)